# Altium PCB view_PCB_4_Sensores.PcbDoc
Units mm, origin at the board's own origin, x right, y up, seen from the top; angles counter-clockwise.
Board outline 141 x 47 mm, 2 copper layers (Top Layer, Bottom Layer); 4 components, 78 nets, 74 pads, 37 vias.
Unrouted connection lines stored in the file: 4.
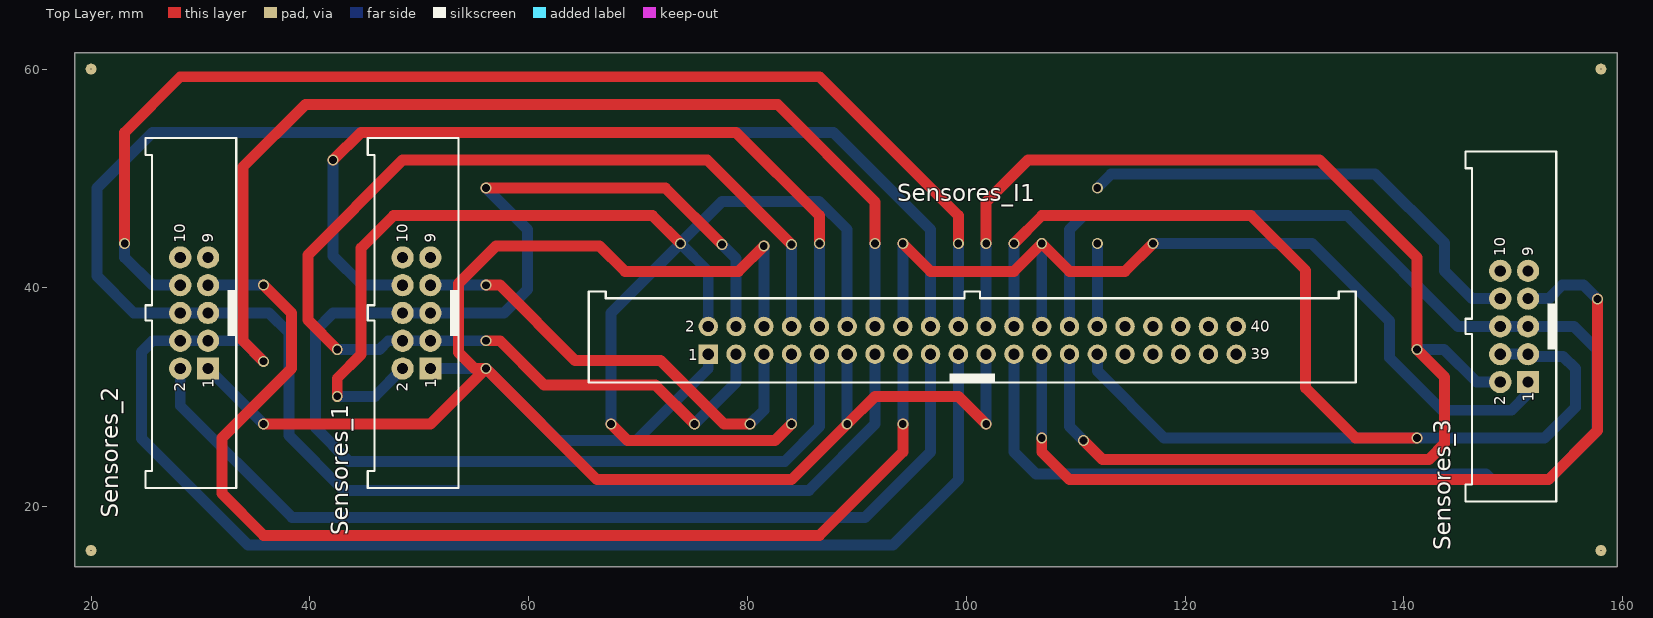
[diagram p0: Top Layer view]
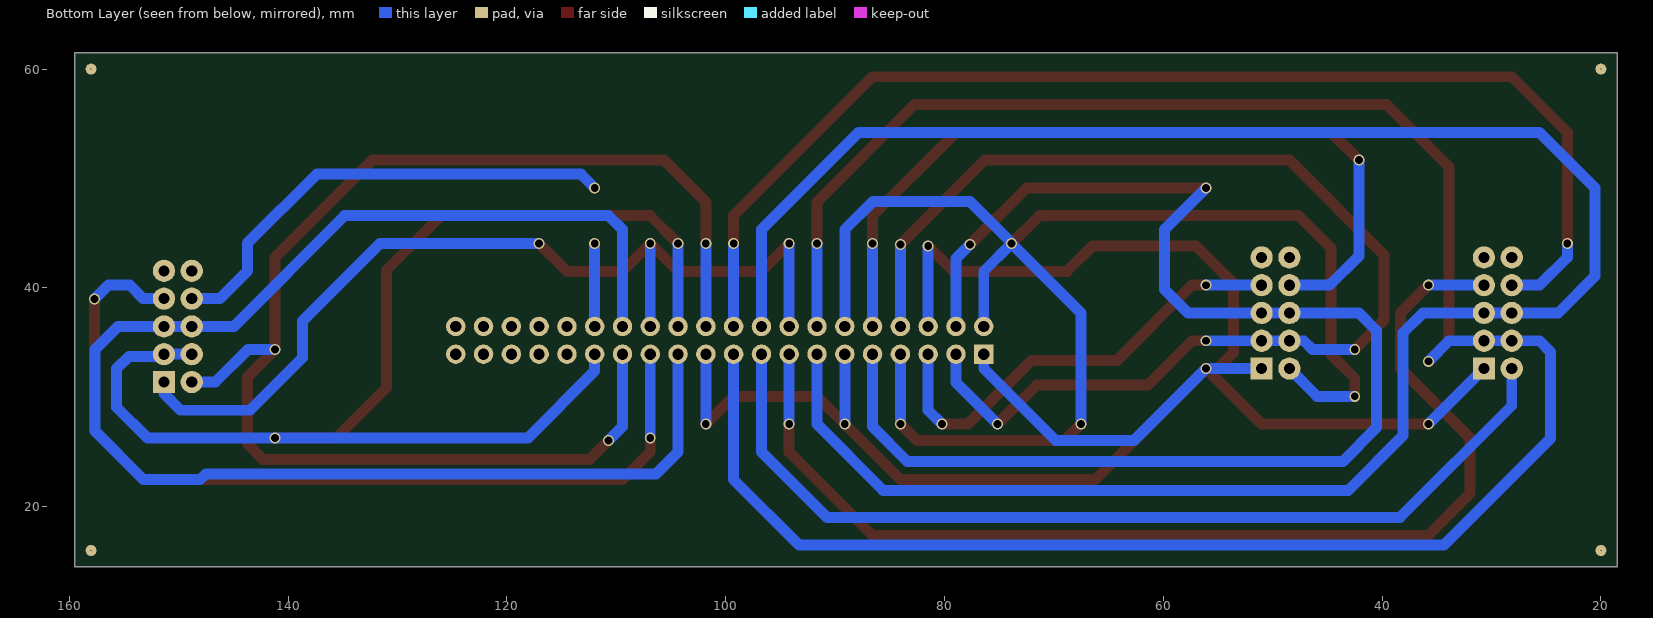
[diagram p1: Bottom Layer view, seen from below]
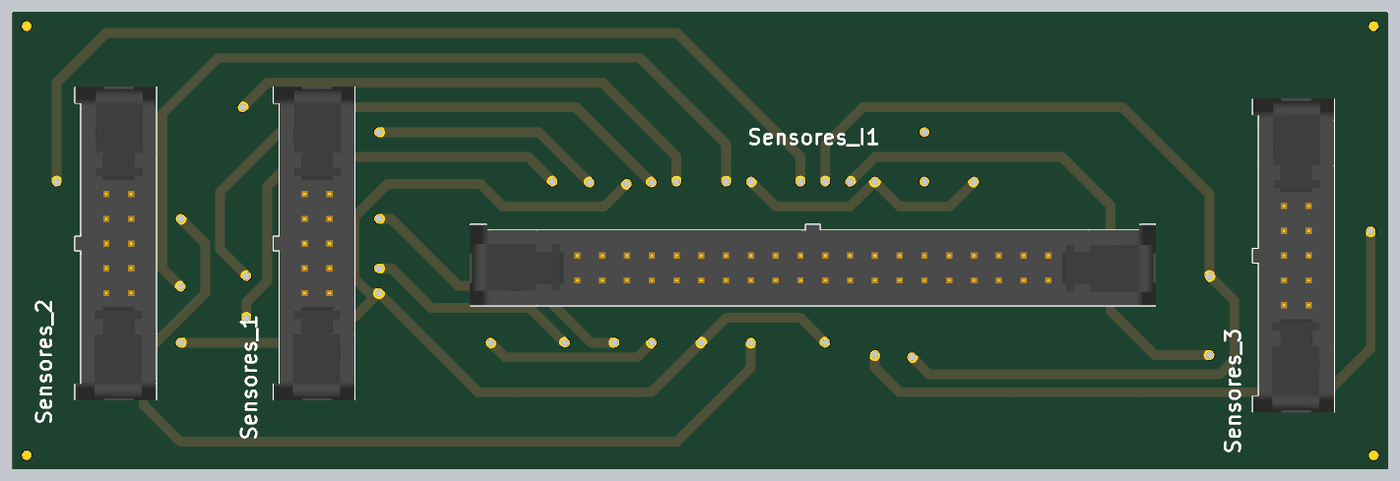
[diagram p2: 3D render of the assembled board from above, using the file's embedded part models]

## Layer stack, top to bottom
Top Solder: solder mask 0.0102, Solder Resist, Dk 3.5
Top Layer: signal copper 0.0356
Dielectric 1: dielectric 0.32, FR-4, Dk 4.8
Bottom Layer: signal copper 0.0356
Bottom Solder: solder mask 0.0102, Solder Resist, Dk 3.5

## Board outline
18.508,61.5 159.508,61.5 159.508,14.5 18.508,14.5

## Design rules (kind name [scope] priority, off if disabled: settings)
Clearance [All] p1: gap=0.254 ignorepadtopadclearanceinfootprint=FALSE except(0: Arc-Hole Track-Hole SMDPad-Hole THPad-Hole Via-Hole Fill-Hole Poly-Hole Region-Hole Text-Hole; 0.1: Arc-Fill Arc-Poly Arc-Region Track-Fill Track-Poly Track-Region SMDPad-Fill SMDPad-Poly SMDPad-Region THPad-Fill THPad-Poly THPad-Region Via-Fill Via-Poly Via-Region Fill-Fill Fill-Poly Fill-Region Poly-Poly Poly-Region Region-Region)
ParallelSegment [All] p1: limit=800.217 gap=0.25
PlaneClearance [All] p1: clearance=0.01
PolygonConnect [All] p1: connectstyle=Relief reliefconductorwidth=0.254 reliefentries=4 polygonreliefangle="90 Angle" airgapwidth=0.254
RoutingCorners [All] p1: cornerstyle=45-Degree minsetback=5.08 maxsetback=2.54
RoutingPriority [OnLayer('Bottom Layer')] p1: routingpriority=6
RoutingVias [All] p1: holewidth=0.711 width=1.57 viastyle="Through Hole" minholewidth=0.5 minwidth=1 maxholewidth=0.711 maxwidth=1.67
SolderMaskExpansion [All] p1: expansion=0.102
UnRoutedNet [All] p1: checkbadconnections=TRUE
Width "Schematic Width Constraint_9" [InNet('GND_8V')] p1: maxlimit=1.27 minlimit=1.27 preferedwidth=1.27
Width "Schematic Width Constraint_7" [InNet('Servo_5')] p2: maxlimit=0.762 minlimit=0.762 preferedwidth=0.762
Width "Schematic Width Constraint_6" [InNet('Servo_7')] p3: maxlimit=0.762 minlimit=0.762 preferedwidth=0.762
Width "Schematic Width Constraint_5" [InNet('Servo_8')] p4: maxlimit=0.762 minlimit=0.762 preferedwidth=0.762
Width "Schematic Width Constraint_4" [InNet('Servo_6')] p5: maxlimit=0.762 minlimit=0.762 preferedwidth=0.762
Width "Schematic Width Constraint_3" [InNet('Servo_2')] p6: maxlimit=0.762 minlimit=0.762 preferedwidth=0.762
Width "Schematic Width Constraint_2" [InNet('Servo_4')] p7: maxlimit=0.762 minlimit=0.762 preferedwidth=0.762
Width "Schematic Width Constraint_1" [InNet('Servo_3')] p8: maxlimit=0.762 minlimit=0.762 preferedwidth=0.762
Width "Schematic Width Constraint_8" [InNet('Servo_1')] p9: maxlimit=0.762 minlimit=0.762 preferedwidth=0.762
Width "Schematic Width Constraint" [InNet('VCC_8V')] p10: maxlimit=1.524 minlimit=1.27 preferedwidth=1.524
Width [All] p11: maxlimit=1 minlimit=0.2 preferedwidth=1 minimp=50.000000 maximp=50.000000 favimp=50.000000
26 further rules are at their usual default settings.

## Components (designator, comment, footprint, x,y, rotation, side; value= is the part's Value field where it differs from the comment)
Sensores_1 "61201022021" 61201022021 49.748,37.71 r90 top
Sensores_2 "61201022021" 61201022021 29.428,37.71 r90 top
Sensores_3 "61201022021" 61201022021 150.078,36.48 r90 top
Sensores_I1 "61204022021" 61204022021 100.548,35.21 r0 top

## Footprints (in the part's own frame and the unit in brackets; to place one, negate y for a bottom-side part, rotate by r counter-clockwise, add the part's x,y. Pads: shape width x height; smd on the part's side, far side on the other; paste and mask are expansions set on the pad)
61201022021 [mil] "10 pins, straight, short lever, gold plating"
  rect 80x80 hole 40.16: 1(-200,-50)
  round 80 hole 40.16: 2(-200,50) 3(-100,-50) 4(-100,50) 5(0,-50) 6(0,50) 7(100,-50) 8(100,50) 9(200,-50) 10(200,50)
  silkscreen extent -630,-152 630,175, body extent -634,-152 634,175, height 967
61204022021 [mil] "40 pins, straight, short lever, gold plating"
  rect 70x70 hole 40.16: 1(-950,-50)
  round 70 hole 40.16: 2(-950,50) 3(-850,-50) 4(-850,50) 5(-750,-50) 6(-750,50) 7(-650,-50) 8(-650,50) 9(-550,-50) 10(-550,50) 11(-450,-50) 12(-450,50) 13(-350,-50) 14(-350,50) 15(-250,-50) 16(-250,50) 17(-150,-50) 18(-150,50) 19(-50,-50) 20(-50,50) 21(50,-50) 22(50,50) 23(150,-50) 24(150,50) 25(250,-50) 26(250,50) 27(350,-50) 28(350,50) 29(450,-50) 30(450,50) 31(550,-50) 32(550,50) 33(650,-50) 34(650,50) 35(750,-50) 36(750,50) 37(850,-50) 38(850,50) 39(950,-50) 40(950,50)
  silkscreen extent -1380,-152 1380,175, body extent -1384,-152 1384,175, height 967

## Part data
Sensores_1 Sensores_2 Sensores_3: "Male Box Header WR-BHD with lever, THT, Vertical, pitch 2.54 mm, 10 pins", Contact Resistance="20 mOhm", Operating Temperature="-40 to 125 degC", Withstanding Voltage="500 VAC", Working Voltage="250 VAC", ComponentLink1Description=Manufacturer, ComponentLink1URL=http://www.we-online.de, ComponentLink2Description=Datasheet, ComponentLink2URL=https://katalog.we-online.de/em/datasheet/6120xx22021.pdf, Gender=Male, Mounting Technology=THT, Orientation=Vertical, Packaging=Tray, Part Number=61201022021, Pin Number=10, Pitch="2.54 mm", Published Date="August 2018", Publisher="Wurth Elektronik"
Sensores_I1: "Male Box Header WR-BHD with lever, THT, Vertical, pitch 2.54 mm, 40 pins", Contact Resistance="20 mOhm", Operating Temperature="-40 to 125 degC", Withstanding Voltage="500 VAC", Working Voltage="250 VAC", ComponentLink1Description=Manufacturer, ComponentLink1URL=http://www.we-online.de, ComponentLink2Description=Datasheet, ComponentLink2URL=https://katalog.we-online.de/em/datasheet/6120xx22021.pdf, Gender=Male, Mounting Technology=THT, Orientation=Vertical, Packaging=Tray, Part Number=61204022021, Pin Number=40, Pitch="2.54 mm", Published Date="August 2018", Publisher="Wurth Elektronik"

## Free pads (board coordinates)
  round 1 hole 0.1: 1(20.008,16) 1(20.008,60) 1(158.008,16) 1(158.008,60)

## Via types
v1: diameter 1, hole 0.711, Top Layer to Bottom Layer, 37 vias

## Nets (pads, with @x,y where several pads share a name; then routed paths per layer and width w, separated by ;. In a path a pad name is that pad's centre, name@x,y a point inside that pad or via, vN(x,y) a via of type N, cw(c..) or ccw(c..) an arc to the next point about the centre after c; other vN are vias at no path point)
3V3_uC: 
"ADD 1": Sensores_1.7 Sensores_I1.5 | length 41.3
  Top Layer w1: v1(56.098,40.25) 57.368,40.25 64.248,33.37 72.049,33.37 77.869,27.55 v1(80.228,27.55)
  Bottom Layer w1: Sensores_1.7 v1(56.098,40.25) ; v1(80.228,27.55) 81.498,28.82 Sensores_I1.5@81.498,33.9
"ADD 2": Sensores_1.8 Sensores_I1.10 | length 75
  Top Layer w1: v1(42.128,51.68) 44.668,54.22 78.958,54.22 86.578,46.6 v1(86.578,44.06)
  Bottom Layer w1: v1(42.128,51.68) 42.128,42.917 44.795,40.25 Sensores_1.8 ; Sensores_I1.10@86.578,36.44 v1(86.578,44.06)
"ADD 3": Sensores_2.7 Sensores_I1.15 | length 103.7
  Top Layer w1: v1(35.778,40.25) 38.318,37.71 38.318,32.63 31.968,26.28 31.968,21.2 35.778,17.39 86.578,17.39 94.198,25.01 v1(94.198,27.55)
  Bottom Layer w1: Sensores_2.7 v1(35.778,40.25) ; v1(94.198,27.55) Sensores_I1.15
"ADD 4": Sensores_2.8 Sensores_I1.20 | length 111.2
  Top Layer w1: v1(23.078,44.06) 23.078,54.22 28.158,59.3 86.578,59.3 99.278,46.6 v1(99.278,44.06)
  Bottom Layer w1: v1(23.078,44.06) 23.078,42.79 25.618,40.25 Sensores_2.8 ; Sensores_I1.20 v1(99.278,44.06)
"ADD 5": Sensores_3.7 Sensores_I1.25 | length 82
  Top Layer w1: v1(106.898,26.28) 106.898,25.01 109.438,22.47 153.213,22.47 157.698,26.955 v1(157.698,38.98)
  Bottom Layer w1: v1(106.898,26.28) Sensores_I1.25@106.898,33.899 ; Sensores_I1.25 Sensores_I1.25 ; Sensores_3.7 153.248,39.02 154.478,40.25 156.428,40.25 v1(157.698,38.98)
"ADD 6": Sensores_3.8 Sensores_I1.30 | length 51.2
  Bottom Layer w1: Sensores_I1.30@111.978,36.44 Sensores_I1.30 v1(111.978,44.06) ; v1(111.978,49.14) 113.248,50.41 137.378,50.41 143.698,44.09 143.698,41.55 146.228,39.02 Sensores_3.8
DBG0: 
DBG1: 
DBG2: 
"GND (SENSOR)": Sensores_1.2 Sensores_2.2 Sensores_3.2 Sensores_I1.2 Sensores_I1.7 Sensores_I1.12 Sensores_I1.17 Sensores_I1.22 Sensores_I1.27 | length 344.9
  Top Layer w1: v1(42.508,30.09) 42.508,31.74 44.668,33.9 44.668,43.63 47.638,46.6 71.338,46.6 v1(73.878,44.06) ; v1(67.528,27.55) 69.028,26.05 82.519,26.05 84.019,27.55 v1(84.038,27.55) ; v1(101.818,44.06) 101.818,47.87 105.628,51.68 132.298,51.68 141.188,42.79 v1(141.188,34.38) 143.728,31.84 143.728,25.765 142.281,24.318 112.442,24.318 v1(110.708,26.051)
  Bottom Layer w1: Sensores_2.2 28.158,29.23 38.388,19 90.728,19 96.738,25.01 Sensores_I1.17 ; v1(42.508,30.09) 45.938,30.09 Sensores_1.2 ; v1(67.528,27.55) 67.528,37.71 v1(73.878,44.06) ; Sensores_I1.2 76.418,41.52 v1(73.878,44.06) ; v1(84.038,27.55) Sensores_I1.7@84.038,33.899 ; Sensores_I1.7 Sensores_I1.7 ; Sensores_I1.12 89.118,45.33 86.538,47.91 77.663,47.91 73.878,44.125 v1(73.878,44.06) ; Sensores_I1.22 v1(101.818,44.06) ; Sensores_I1.27@109.438,33.899 109.438,27.321 v1(110.708,26.051) ; Sensores_I1.27 Sensores_I1.27 ; v1(141.188,34.38) 143.678,34.38 146.658,31.4 Sensores_3.2
GND_8V: 
GND_uC: 
I2C1-SCL: Sensores_1.3 Sensores_1.4 Sensores_I1.3 Sensores_I1.8 | length 112.3
  Top Layer w1: v1(42.508,34.38) 39.818,37.07 39.818,43.02 48.478,51.68 76.327,51.68 v1(84.038,43.969) ; v1(56.098,35.17) 57.368,35.17 61.418,31.12 71.578,31.12 v1(75.148,27.55)
  Bottom Layer w1: v1(42.508,34.38) 46.378,34.38 47.168,35.17 Sensores_1.4 Sensores_1.3 v1(56.098,35.17) ; v1(75.148,27.55) 78.958,31.36 Sensores_I1.3@78.958,33.9 ; Sensores_I1.8@84.038,36.44 Sensores_I1.8 v1(84.038,43.969)
I2C1-SDA: Sensores_1.5 Sensores_1.6 Sensores_I1.4 Sensores_I1.9 | length 127.7
  Top Layer w1: v1(56.098,49.14) 72.492,49.14 v1(77.663,43.969)
  Bottom Layer w1: v1(56.098,49.14) 59.908,45.33 59.908,39.86 57.758,37.71 Sensores_1.5 Sensores_1.6 42.128,37.71 40.508,36.09 40.508,27.23 43.588,24.15 83.408,24.15 86.578,27.32 Sensores_I1.9@86.578,33.9 ; v1(77.663,43.969) 78.958,42.674 Sensores_I1.4 Sensores_I1.4@78.958,36.44
I2C2-SCL: Sensores_2.5 Sensores_2.6 Sensores_I1.13 Sensores_I1.18 | length 192.5
  Bottom Layer w1: Sensores_I1.13 91.658,27.55 85.608,21.5 43.098,21.5 38.088,26.51 38.088,35.9 36.278,37.71 Sensores_2.5 Sensores_2.6 23.908,37.71 20.538,41.08 20.538,49.14 25.618,54.22 87.848,54.22 96.738,45.33 Sensores_I1.18
I2C2-SDA: Sensores_2.3 Sensores_2.4 Sensores_I1.14 Sensores_I1.19 | length 206.7
  Top Layer w1: v1(35.778,33.29) 33.899,35.17 33.899,51.07 39.588,56.76 82.768,56.76 91.658,47.87 v1(91.658,44.06)
  Bottom Layer w1: v1(35.778,33.29) 33.899,35.17 Sensores_2.3 Sensores_2.4 25.618,35.17 24.608,34.16 24.608,26.23 34.338,16.5 93.308,16.5 99.278,22.47 Sensores_I1.19 ; Sensores_I1.14 v1(91.658,44.06)
I2C3-SCL: Sensores_3.5 Sensores_3.6 Sensores_I1.23 Sensores_I1.28 | length 135.2
  Bottom Layer w1: Sensores_I1.23@104.358,33.899 104.358,25.01 106.368,23 147.516,23 148.046,22.47 153.213,22.47 157.658,26.915 157.658,34.38 155.558,36.48 Sensores_3.5 Sensores_3.6 144.958,36.48 134.838,46.6 110.708,46.6 109.438,45.33 Sensores_I1.28 Sensores_I1.28@109.438,36.44 ; Sensores_I1.23 Sensores_I1.23
I2C3-SDA: Sensores_3.3 Sensores_3.4 Sensores_I1.24 Sensores_I1.29 | length 120.1
  Top Layer w1: v1(104.358,44.06) 106.898,46.6 126.038,46.6 131.028,41.61 131.028,30.85 135.598,26.28 v1(141.188,26.28)
  Bottom Layer w1: Sensores_I1.24@104.358,36.44 Sensores_I1.24 v1(104.358,44.06) ; Sensores_I1.29@111.978,33.9 111.98,33.899 111.98,32.389 118.088,26.28 v1(141.188,26.28) 152.858,26.28 155.673,29.095 155.673,32.63 154.561,33.743 151.546,33.743 Sensores_3.3 Sensores_3.4
NetQ1_1: 
NetQ1_2: 
NetQ2_1: 
NetQ2_2: 
NetQ3_1: 
NetQ3_2: 
NetQ4_1: 
NetQ4_2: 
NetQ5_1: 
NetQ5_2: 
NetQ6_1: 
NetQ6_2: 
NetQ7_1: 
NetQ7_2: 
NetQ8_1: 
NetQ8_2: 
NetR1_1: 
NetR2_1: 
NetR3_1: 
NetR4_1: 
NetR9_1: 
NetR10_1: 
NetR11_1: 
NetR12_1: 
NetR17_1: 
NetR18_1: 
NetR19_1: 
NetR20_1: 
NetR25_1: 
NetR26_1: 
NetR27_1: 
NetR28_1: 
PWM_Servo_1: 
PWM_Servo_2: 
PWM_Servo_3: 
PWM_Servo_4: 
PWM_Servo_5: 
PWM_Servo_6: 
PWM_Servo_7: 
PWM_Servo_8: 
Sensor_Servo_1: 
Sensor_Servo_2: 
Sensor_Servo_3: 
Sensor_Servo_4: 
Sensor_Servo_5: 
Sensor_Servo_6: 
Sensor_Servo_7: 
Sensor_Servo_8: 
Servo_1: 
Servo_2: 
Servo_3: 
Servo_4: 
Servo_5: 
Servo_6: 
Servo_7: 
Servo_8: 
"VCC  (SENSOR)": Sensores_1.1 Sensores_2.1 Sensores_3.1 Sensores_I1.1 Sensores_I1.6 Sensores_I1.11 Sensores_I1.16 Sensores_I1.21 Sensores_I1.26 | length 263.2
  Top Layer w1: v1(35.778,27.55) 51.018,27.55 v1(56.098,32.63) ; v1(81.498,43.83) 79.188,41.52 68.798,41.52 66.488,43.83 57.011,43.83 53.598,40.417 53.598,34.1 55.068,32.63 v1(56.098,32.63) ; v1(94.198,44.06) 96.738,41.52 104.358,41.52 v1(106.898,44.06) 109.438,41.52 114.518,41.52 v1(117.058,44.06) ; v1(101.818,27.55) 99.278,30.09 91.658,30.09 v1(89.118,27.55) 84.038,22.47 66.258,22.47 v1(56.098,32.63)
  Bottom Layer w1: Sensores_2.1 v1(35.778,27.55) ; Sensores_1.1 v1(56.098,32.63) 62.678,26.05 69.838,26.05 76.418,32.63 Sensores_I1.1@76.418,33.899 ; Sensores_I1.1 Sensores_I1.1 ; Sensores_I1.6 v1(81.498,43.83) ; v1(89.118,27.55) Sensores_I1.11 ; Sensores_I1.16 v1(94.198,44.06) ; v1(101.818,27.55) Sensores_I1.21 ; Sensores_I1.26@106.898,36.44 Sensores_I1.26 v1(106.898,44.06) ; v1(117.058,44.06) 131.608,44.06 138.688,36.98 138.688,33.619 143.487,28.82 149.828,28.82 151.348,30.34 Sensores_3.1
VCC_8V: 
VCC_uC: 
pads on no net: Sensores_1.9 Sensores_1.10 Sensores_2.9 Sensores_2.10 Sensores_3.9 Sensores_3.10 Sensores_I1.31 Sensores_I1.32 Sensores_I1.33 Sensores_I1.34 Sensores_I1.35 Sensores_I1.36 Sensores_I1.37 Sensores_I1.38 Sensores_I1.39 Sensores_I1.40

## Dimensions
18.508,14.5 to 18.508,61.5 on Top Overlay
18.508,61.5 to 159.508,61.5 on Top Overlay

## Text inside footprints (layer, text, board x,y; h text height)
Sensores_1: Top Overlay "9" at 51.488,44.11 h1.02 r90; Top Overlay "1" at 51.548,30.81 h1.02 r90; Top Overlay "10" at 48.948,44.11 h1.02 r90; Top Overlay "2" at 48.948,30.51 h1.02 r90
Sensores_2: Top Overlay "9" at 31.168,44.11 h1.02 r90; Top Overlay "1" at 31.228,30.81 h1.02 r90; Top Overlay "10" at 28.628,44.11 h1.02 r90; Top Overlay "2" at 28.628,30.51 h1.02 r90
Sensores_3: Top Overlay "9" at 151.818,42.88 h1.02 r90; Top Overlay "1" at 151.878,29.58 h1.02 r90; Top Overlay "10" at 149.278,42.88 h1.02 r90; Top Overlay "2" at 149.278,29.28 h1.02 r90
Sensores_I1: Top Overlay "39" at 125.998,33.47 h1.02; Top Overlay "40" at 125.998,36.01 h1.02; Top Overlay "2" at 74.298,36.01 h1.02; Top Overlay "1" at 74.598,33.41 h1.02